# Altium PCB A1_v39_noteardrops.PcbDoc
Units mil, origin at the board's own origin, x right, y up, seen from the top; angles counter-clockwise.
Board outline 3937.01 x 3149.61 mil, 2 copper layers (Top Layer, Bottom Layer); 46 components, 70 nets, 239 pads, 35 vias.
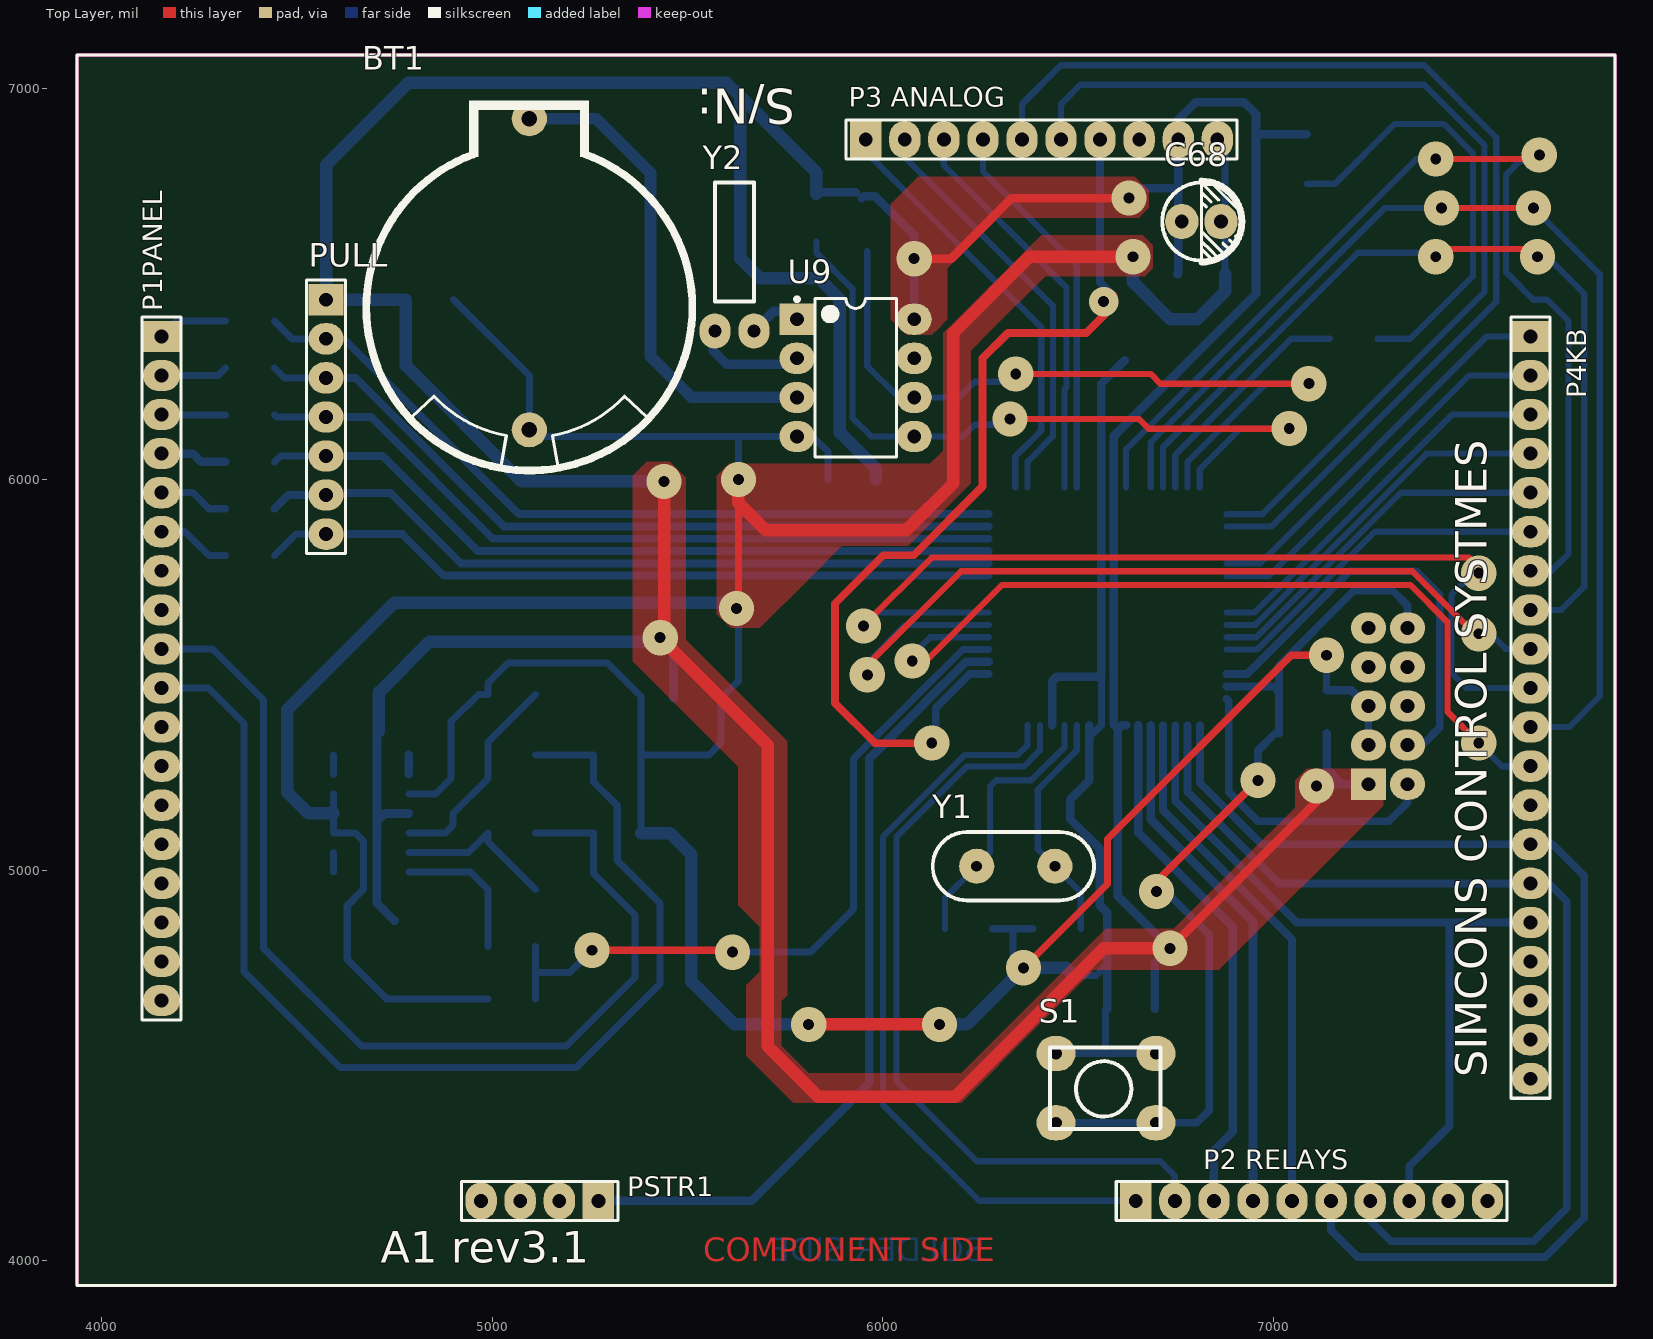
[diagram p0: Top Layer view]
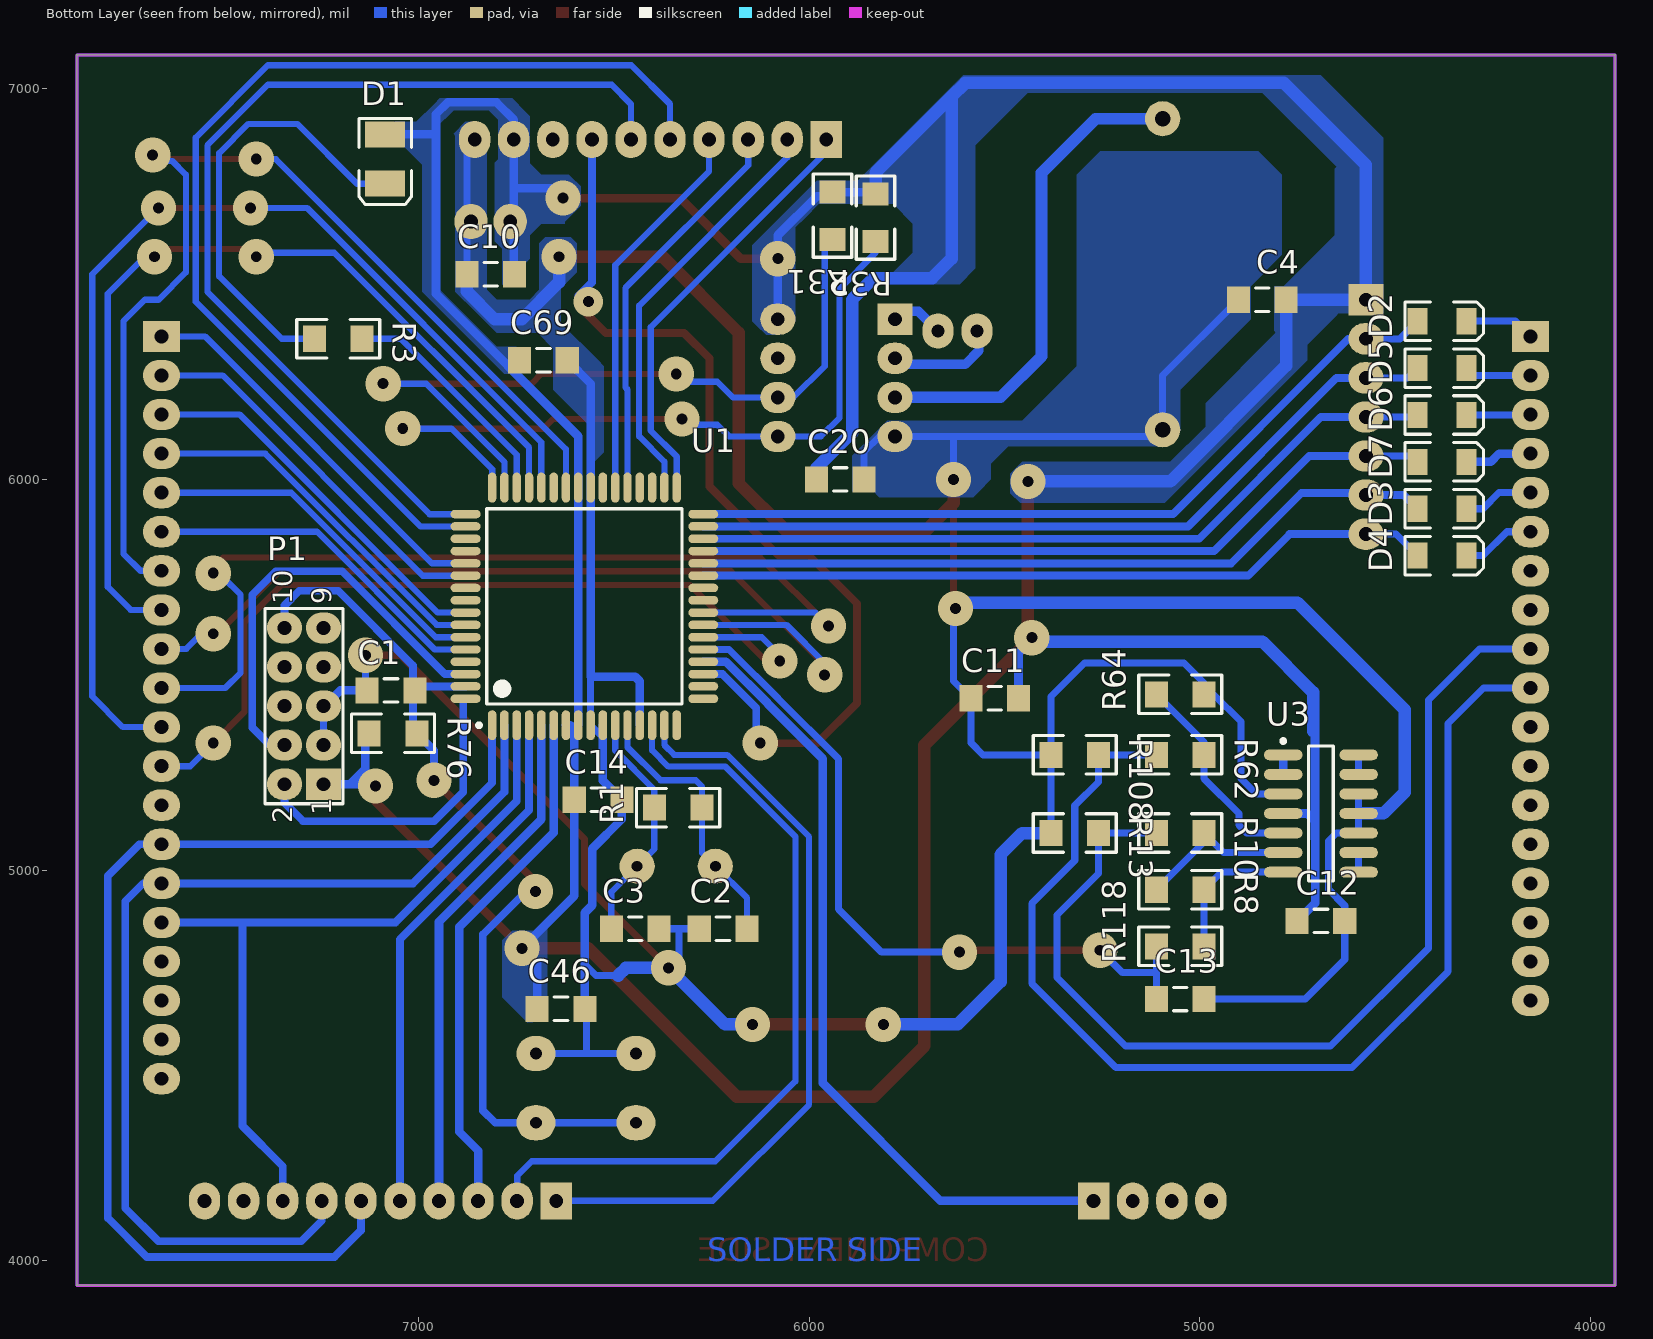
[diagram p1: Bottom Layer view, seen from below]
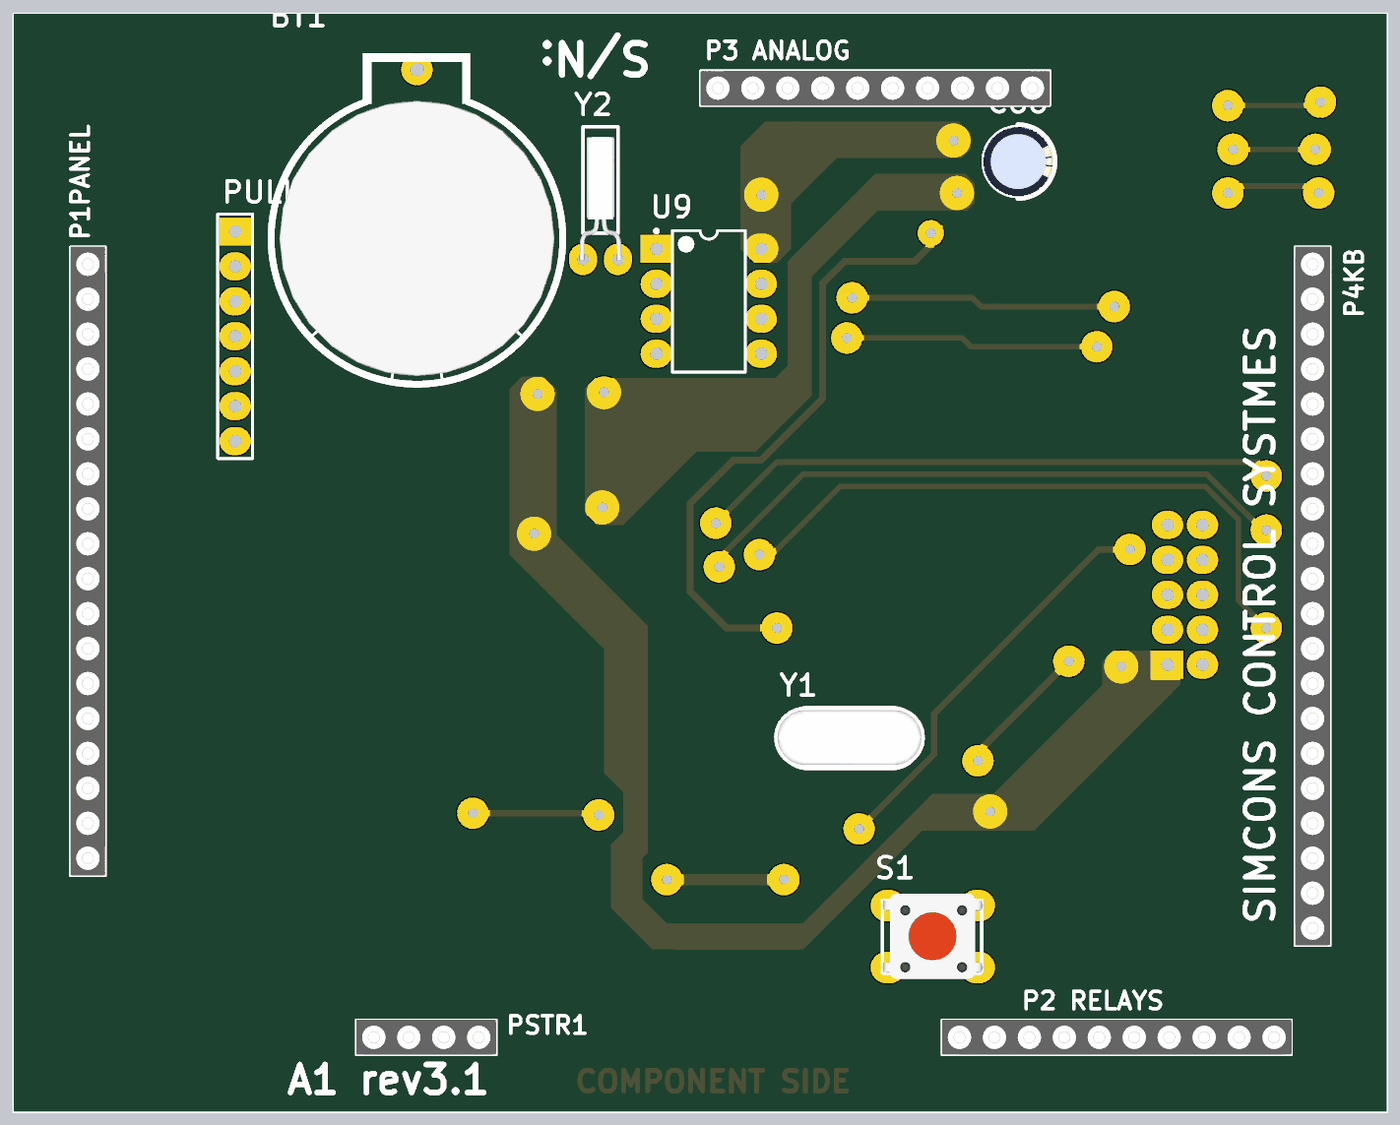
[diagram p2: 3D render of the assembled board from above, using the file's embedded part models]
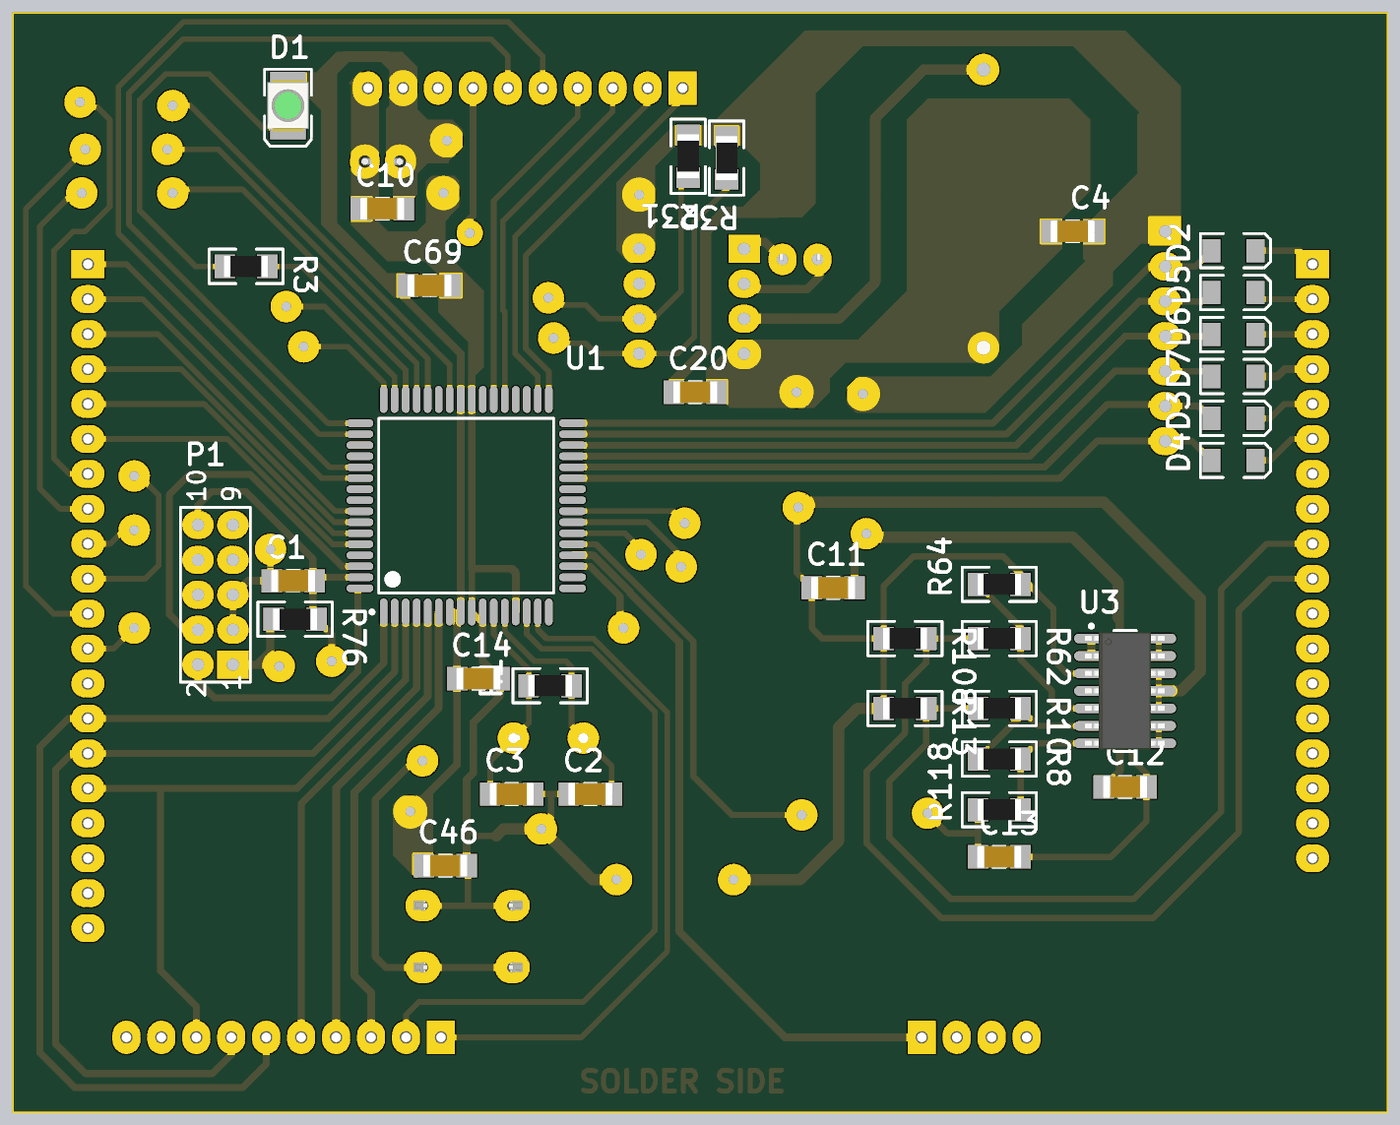
[diagram p3: 3D render of the assembled board from below, using the file's embedded part models]

## Layer stack, top to bottom
Top Solder: solder mask 0.4, Solder Resist, Dk 3.5
Top Layer: signal copper 1.4
Dielectric1: dielectric 12.6, FR-4, Dk 4.8
Bottom Layer: signal copper 1.4
Bottom Solder: solder mask 0.4, Solder Resist, Dk 3.5

## Board outline
3937.01,3937.01 7874.02,3937.01 7874.02,7086.61 3937.01,7086.61

## Design rules (kind name [scope] priority, off if disabled: settings)
Clearance [All] p1: gap=8
Height [All] p1: minheight=0 maxheight=10000 prefheight=500
MinimumSolderMaskSliver [All] p1 off: minsoldermaskwidth=10
PlaneClearance [All] p1: clearance=22
PlaneConnect [All] p1: planeconnectstyle=Direct reliefexpansion=20 reliefentries=4 reliefconductorwidth=10 reliefairgap=10
PolygonConnect [All] p1: connectstyle=Direct reliefconductorwidth=10 reliefentries=4 polygonreliefangle="90 Angle" airgapwidth=10
RoutingVias [All] p1: holewidth=28 width=90 viastyle="Through Hole" minholewidth=28 minwidth=60 maxholewidth=28 maxwidth=100
SilkToSilkClearance [All] p1 off: silktosilkclearance=10
SilkToSolderMaskClearance SilkscreenOverComponentPads [IsPad] p1 off: minsilkscreentomaskgap=10 clearancetoexposedcopper=TRUE
SolderMaskExpansion [All] p1: expansion=4
Width [All] p1: maxlimit=60 minlimit=16 preferedwidth=22
23 further rules are at their usual default settings.

## Components (designator, comment, footprint, x,y, rotation, side; value= is the part's Value field where it differs from the comment)
BT1 "CR2032" CELL_HOLDER 5095,6440 r90 top
C1 ".1uF 1206" C1206_W 7070,5460 r180 bottom
C2 "22pF 1206" C1206_W 6220,4850 r180 bottom
C3 "22pF 1206" C1206_W 6445,4850 r0 bottom
C4 ".1uF 1206" C1206_W 4840,6460 r180 bottom
C10 ".1uF 1206" C1206_W 6815,6525 r180 bottom
C11 "1uF 1206" C1206_W 5525,5440 r180 bottom
C12 ".1uF 1206" C1206_W 4690,4870 r0 bottom
C13 ".1uF 1206" C1206_W 5050,4670 r180 bottom
C14 ".1uF 1206" C1206_W 6540,5180 r0 bottom
C20 ".1uF 1206" C1206_W 5920,6000 r0 bottom
C46 ".1uF 1206" C1206_W 6635,4645 r0 bottom
C68 "100uF/25V" Cap_.1 6815,6660 r90 top
C69 ".1uF 1206" C1206_W 6680,6305 r0 bottom
D1 "LED GREEN SMD" "LED SMD" 7085,6820 r270 bottom
D2 "Diode 1N4001" 4148SMD 4380,6405 r0 bottom
D3 "Diode 1N4001" 4148SMD 4380,5925 r0 bottom
D4 "Diode 1N4001" 4148SMD 4380,5805 r0 bottom
D5 "Diode 1N4001" 4148SMD 4380,6285 r0 bottom
D6 "Diode 1N4001" 4148SMD 4380,6165 r0 bottom
D7 "Diode 1N4001" 4148SMD 4380,6045 r0 bottom
P1 "Header 5X2" HDR2X5 7242.5,5220 r90 bottom
P1PANEL "Header 18" HDR1X18_BURGE_F 4153.54,6366.14 r270 top locked
"P2 RELAYS" "Header 10" HDR1X10_BURGE_F 6647.24,4153.54 r0 top locked
"P3 ANALOG" "Header 10" HDR1X10_BURGE_F 5955.91,6870.08 r0 top locked
P4KB "Header 20" HDR1X20_BURGE_F 7657.48,6366.14 r270 top locked
PSTR1 "Header 4" HDR1X4_BURGE_F 5271.65,4153.54 r180 top locked
PULL "Header 7" HDR1X7 4575,6460 r270 top
R1 "100K 1206" R1206_W 6335,5160 r0 bottom
R3 "1K 1206" R1206_W 7205,6360 r180 bottom
R8 "1M 1206" R1206_W 5050,4950 r180 bottom
R10 "1M 1206" R1206_W 5050,5095 r180 bottom
R13 "47K 1206" R1206_W 5320,5095 r180 bottom
R31 "4.7K 1206" R1206_W 5940,6675 r270 bottom
R32 "4.7K 1206" R1206_W 5830,6670 r270 bottom
R62 "1M 1206" R1206_W 5050,5295 r180 bottom
R64 "1M 1206" R1206_W 5050,5450 r0 bottom
R76 "100K 1206" R1206_W 7065,5350 r180 bottom
R108 "47K 1206" R1206_W 5320,5295 r180 bottom
R118 "100K 1206" R1206_W 5050,4805 r0 bottom
S1 "TACT SWITCH" SWSMALL 6565,4440 r270 top
U1 "MKE02Z Kinetis Cortex M0+ MCU" PLQP0064GA-A_M 6575,5675 r90 bottom
U3 "LM324D" SOIC14_M 4690,5145 r180 bottom
U9 "DS1307" DIP-8 5930,6260 r0 top
Y1 "XTAL 16MHz MINI" XTAL 6340,5010 r180 top
Y2 "XTAL 32.768KHz 6pF" XTALWATCH 5620,6380 r0 top

## Footprints (in the part's own frame and the unit in brackets; to place one, negate y for a bottom-side part, rotate by r counter-clockwise, add the part's x,y. Pads: shape width x height; smd on the part's side, far side on the other; paste and mask are expansions set on the pad)
4148SMD [mm] "Diode 250mA"
  rect 1.3x1.7 smd: 1(1.6,0) 2(-1.6,0)
  silkscreen extent -2.7,-1.25 2.4,1.25, body extent -1.78,-0.76 1.9,0.76, height 1.52
C1206_W [mm] "Chip Capacitor, Body 3.2x1.6mm, IPC High Density"
  rect 1.5x1.7 smd: 1(-1.55,0) 2(1.55,0)
  silkscreen extent -0.44,-0.76 0.44,0.76, body extent -1.6,-0.8 1.6,0.8, height 1
Cap_.1 [mil]
  oval 90x85 hole 35.43: 1(0,50) 2(0,-50)
  silkscreen extent -105,-105 105,100, body extent -100,-100 100,100, height 500
CELL_HOLDER [mil] "Lithium Battery Holder for CR2032 3V Cell"
  round 90 hole 39.37: 1(483.27,0)
  round 90 hole 39.37 mask+0: 2(-312.99,0)
  silkscreen extent -417,-417 530,417, body extent -418,-417 519,418, height 394
DIP-8 [mil] "DIP; 8 Leads; Row Spacing 7.62 mm; Pitch 2.54 mm"
  rect 90x80 hole 35.43: 1(-150,150)
  oval 90x80 hole 35.43: 2(-150,50) 3(-150,-50) 4(-150,-150) 5(150,-150) 6(150,-50) 7(150,50) 8(150,150)
  silkscreen extent -155,-203 104,206, body extent -142,-203 142,203, height 200
HDR1X4_BURGE_F [mil] "Connector; Header; 4 Position"
  rect 80x95 hole 35.43: 1(0,0)
  oval 80x95 hole 35.43: 2(100,0) 3(200,0) 4(300,0)
  silkscreen extent -50,-50 350,50, body extent -50,-50 350,50, height 237
HDR1X7 [mil] "Connector; Header; 7 Position"
  rect 80x90 hole 35.43: 1(0,0)
  oval 80x90 hole 35.43: 2(100,0) 3(200,0) 4(300,0) 5(400,0) 6(500,0) 7(600,0)
  silkscreen extent -50,-50 650,50
HDR1X10_BURGE_F [mil] "Connector; Header; 10 Position"
  rect 80x95 hole 35.43: 1(0,0)
  oval 80x95 hole 35.43: 2(100,0) 3(200,0) 4(300,0) 5(400,0) 6(500,0) 7(600,0) 8(700,0) 9(800,0) 10(900,0)
  silkscreen extent -50,-50 950,50, body extent -50,-50 950,50, height 237
HDR1X18_BURGE_F [mil] "Connector; Header; 18 Position"
  rect 80x95 hole 35.43: 1(0,0)
  oval 80x95 hole 35.43: 2(100,0) 3(200,0) 4(300,0) 5(400,0) 6(500,0) 7(600,0) 8(700,0) 9(800,0) 10(900,0) 11(1000,0) 12(1100,0) 13(1200,0) 14(1300,0) 15(1400,0) 16(1500,0) 17(1600,0) 18(1700,0)
  silkscreen extent -50,-50 1750,50, body extent -50,-50 1750,50, height 237
HDR1X20_BURGE_F [mil] "Connector; Header; 20 Position"
  rect 80x95 hole 35.43: 1(0,0)
  oval 80x95 hole 35.43: 2(100,0) 3(200,0) 4(300,0) 5(400,0) 6(500,0) 7(600,0) 8(700,0) 9(800,0) 10(900,0) 11(1000,0) 12(1100,0) 13(1200,0) 14(1300,0) 15(1400,0) 16(1500,0) 17(1600,0) 18(1700,0) 19(1800,0) 20(1900,0)
  silkscreen extent -50,-50 1950,50, body extent -50,-50 1950,50, height 237
HDR2X5 [mil] "Connector; Header; 5x2 Position"
  rect 80x90 hole 35.43: 1(0,0)
  oval 80x90 hole 35.43: 2(0,100) 3(100,0) 4(100,100) 5(200,0) 6(200,100) 7(300,0) 8(300,100) 9(400,0) 10(400,100)
  silkscreen extent -50,-50 450,150
"LED SMD" [mm] "SM LED; 2 C-Bend Leads; Body 3.5 x 2.8 x 1.9 mm, inc leads (LxWxH typ)"
  rect 1.7x2.6 smd: 1(-1.6,0) 2(1.6,0)
  silkscreen extent -2.65,-1.7 2.95,1.7, body extent -1.85,-1.5 1.85,1.5, height 2.1
PLQP0064GA-A_M [mm] "QFP, 64-Leads, Body 14x14mm, Pitch 0.8mm, IPC Low Density"
  oval 1.95x0.55 smd: 1(-7.725,6) 2(-7.725,5.2) 3(-7.725,4.4) 4(-7.725,3.6) 5(-7.725,2.8) 6(-7.725,2) 7(-7.725,1.2) 8(-7.725,0.4) 9(-7.725,-0.4) 10(-7.725,-1.2) 11(-7.725,-2) 12(-7.725,-2.8) 13(-7.725,-3.6) 14(-7.725,-4.4) 15(-7.725,-5.2) 16(-7.725,-6) 33(7.725,-6) 34(7.725,-5.2) 35(7.725,-4.4) 36(7.725,-3.6) 37(7.725,-2.8) 38(7.725,-2) 39(7.725,-1.2) 40(7.725,-0.4) 41(7.725,0.4) 42(7.725,1.2) 43(7.725,2) 44(7.725,2.8) 45(7.725,3.6) 46(7.725,4.4) 47(7.725,5.2) 48(7.725,6)
  oval 0.55x1.95 smd: 17(-6,-7.725) 18(-5.2,-7.725) 19(-4.4,-7.725) 20(-3.6,-7.725) 21(-2.8,-7.725) 22(-2,-7.725) 23(-1.2,-7.725) 24(-0.4,-7.725) 25(0.4,-7.725) 26(1.2,-7.725) 27(2,-7.725) 28(2.8,-7.725) 29(3.6,-7.725) 30(4.4,-7.725) 31(5.2,-7.725) 32(6,-7.725) 49(6,7.725) 50(5.2,7.725) 51(4.4,7.725) 52(3.6,7.725) 53(2.8,7.725) 54(2,7.725) 55(1.2,7.725) 56(0.4,7.725) 57(-0.4,7.725) 58(-1.2,7.725) 59(-2,7.725) 60(-2.8,7.725) 61(-3.6,7.725) 62(-4.4,7.725) 63(-5.2,7.725) 64(-6,7.725)
  silkscreen extent -7.85,-6.35 6.35,6.98, body extent -7,-7 7,7, height 1.7
R1206_W [mm] "Chip Capacitor, Body 3.2x1.6mm, IPC High Density"
  rect 1.5x1.7 smd: 1(-1.55,0) 2(1.55,0)
  silkscreen extent -2.7,-1.25 2.7,1.25, body extent -1.59,-0.77 1.59,0.77, height 0.63
SOIC14_M [mm] "SOIC, 14-Leads, Body 8.7x3.9mm, Pitch 1.27mm, IPC Low Density"
  oval 2.5x0.7 smd: 1(-2.45,3.81) 2(-2.45,2.54) 3(-2.45,1.27) 4(-2.45,0) 5(-2.45,-1.27) 6(-2.45,-2.54) 7(-2.45,-3.81) 8(2.45,-3.81) 9(2.45,-2.54) 10(2.45,-1.27) 11(2.45,0) 12(2.45,1.27) 13(2.45,2.54) 14(2.45,3.81)
  silkscreen extent -2.58,-4.4 0.8,4.83, body extent -2.92,-4.28 2.88,4.27, height 1.75
SWSMALL [mil]
  oval 90x100 hole 30: 1(86.61,133.86) 1(86.61,-122.05) 2(-90.55,133.86) 2(-90.55,-122.05)
  silkscreen extent -106,-138 102,146, body extent -125,-151 119,161, height 276
XTAL [mil] "Multi Layer Capacitor"
  round 90 hole 28: 1(-100,0) 2(100,0)
  silkscreen extent -200,-88 212,88, body extent -209,-90 224,87, height 142
XTALWATCH [mil]
  oval 80x90 hole 33: 1(50,0) 2(-50,0)
  silkscreen extent -50,75 50,380, body extent -60,-3 60,350, height 79

## Part data
BT1: library part Battery, "Multicell Battery"
C1 C2 C3 C4 C10 C11 C12 C14 C20 C46 C68 C69: library part Cap, "Capacitor"
C13: library part Cap2, "Capacitor"
D1: library part LED1, "Typical RED GaAs LED"
D2 D3 D4 D5 D6 D7: "1 Amp General Purpose Rectifier"
P1: "Header, 5-Pin, Dual row"
P1PANEL: "Header, 18-Pin"
"P2 RELAYS" "P3 ANALOG": "Header, 10-Pin"
P4KB: "Header, 20-Pin"
PSTR1: "Header, 4-Pin"
PULL: "Header, 7-Pin"
R1 R3 R8 R10 R13 R31 R32 R62 R64 R76 R108: library part Res1, "Resistor"
R118: library part "Res Semi", "Semiconductor Resistor"
S1: library part SW-PB, "Switch"
U1: library part MKE02Z64, "32-Bit ARM Cortex M0+ RISC Core, 64KB Program Flash, 256B EEPROM, 4KB RAM, 64-Pin LQFP"
U3: "Quadruple Operational Amplifier"
U9: "64 X 8 Serial Real-Time Clock"
Y1 Y2: library part XTAL, "Crystal Oscillator"

## Via types
v1: diameter 90, hole 28, Top Layer to Bottom Layer, 34 vias
v2: diameter 75, hole 28, Top Layer to Bottom Layer, 1 vias

## Nets (pads, with @x,y where several pads share a name; then routed paths per layer and width w, separated by ;. In a path a pad name is that pad's centre, name@x,y a point inside that pad or via, vN(x,y) a via of type N, cw(c..) or ccw(c..) an arc to the next point about the centre after c; other vN are vias at no path point)
AUTO: P4KB.8 U1.45 | length 2467.9
  Top Layer w16: v1(7415,6570) 7415,6585 7420,6590 7645,6590 v1@7650,6585 ; v1@7655,6580 v1@7650,6585 ; v1(7675,6570) 7650,6595 v1@7650,6585
  Bottom Layer w16: U1.45 6716.73,6081.73 7215,6580 7400,6580 v1@7415,6595 ; P4KB.8 7736.14,5666.14 7795,5725 7795,6475 7690,6580 v1@7665,6580 ; v1(7675,6570) v1@7665,6580 ; v1@7665,6580 7655,6580 7650,6585 7650,6595 v1@7665,6580
BAT: PSTR1.1 U1.20 | length 2057.5
  Bottom Layer w22: PSTR1.1 5663.54,4153.54 5965,4455 5965,5285 6106,5426 6106,5427.01 6209.76,5530.77 6210.37,5530.77 6212.87,5533.27 U1.20
BTS+_R: P1PANEL.10 R62.1 R108.2 | length 2943.5
  Bottom Layer w18: P1PANEL.10 4273.86,5466.14 4365,5375 4365,4740 4610,4495 5215,4495 5430,4710 5430,4915 5320,5025 5320,5165 5258.98,5226.02 R108.2 R62.1
BTS-_R: P1PANEL.9 R10.1 R13.2 | length 2638.7
  Bottom Layer w18: P1PANEL.9 4283.86,5566.14 4415,5435 4415,4800 4665,4550 5190,4550 5365,4725 5365,4885 5258.98,4991.02 R13.2 R10.1
BTSBATT: C13.1 R118.2 U1.21 | length 1872.5
  Top Layer w18: v1(5255,4795) 5615,4795 v1@5620,4800
  Bottom Layer w18: C13.1 5111.02,4737.5 ; R118.2 5111.02,4737.5 ; v1(5255,4795) 5197.5,4737.5 5111.02,4737.5 ; v1(5615,4790) 5815,4790 5925,4900 5925,5285 6078,5438 6078,5438.61 6198.16,5558.77 6198.77,5558.77 6204.76,5564.76 U1.21
BUZZER: "P2 RELAYS.1" U1.15 | length 1952.6
  Bottom Layer w16: U1.15 6370.28,5320.28 6345,5295 6210,5295 6000,5085 6000,4400 6246.46,4153.54 6647.24,4153.54
CONT_S_IN: P1PANEL.8
CRANK: "P2 RELAYS.4" U1.5 | length 1325.8
  Bottom Layer w22: U1.5 6685.24,5129.76 6947.24,4867.76 6947.24,4153.54
DG-B_: "P3 ANALOG.3" U1.37 | length 1023.2
  Bottom Layer w16: 6155.91,6870.08 6155.91,6804.09 6470,6490 6470,6235.47 6464.76,6230.24 U1.37
DG-R_: "P3 ANALOG.1" U1.33 | length 1104.4
  Bottom Layer w16: 5955.91,6870.08 5955.91,6839.09 6405,6390 6405,6125 6338.78,6058.78 U1.33
DG-Y_: "P3 ANALOG.2" U1.34 | length 1074.8
  Bottom Layer w16: 6055.91,6870.08 6055.91,6824.09 6435,6445 6435,6110 6370.28,6045.28 U1.34
DGSTOP: "P2 RELAYS.5" U1.4 | length 1354.2
  Bottom Layer w20: U1.4 6716.73,5153.27 7047.24,4822.76 7047.24,4153.54
DOWN: P4KB.10 U1.24 | length 2511.3
  Top Layer w16: v1(5950,5625) 6125,5800 7500,5800 7540,5760 v1(7525,5760)
  Bottom Layer w16: v1(5950,5625) 5984.25,5659.25 U1.24 ; v1@7500,5750 7455,5705 7455,5505 7493.86,5466.14 P4KB.10
EB-B_: "P3 ANALOG.6" U1.49 | length 2530.9
  Bottom Layer w16: 6455.91,6870.08 6455.91,6960.91 6505,7010 7385,7010 7540,6855 7540,6480 6971.22,5911.22 U1.49
EB-R_: "P3 ANALOG.4" U1.38 | length 990.5
  Bottom Layer w16: 6255.91,6870.08 6255.91,6789.09 6496.26,6548.74 U1.38
EB-Y_: "P3 ANALOG.5" U1.50 | length 2771.8
  Bottom Layer w16: 6355.91,6870.08 6355.91,6960.91 6455,7060 7385,7060 7570,6875 7570,6455 6994.72,5879.72 U1.50
EMSTP: D7.1 PULL.5 U1.29 | length 1934.9
  Bottom Layer w18: D7.1 4457.99,6060 PULL.5
  Bottom Layer w20: PULL.5 4720,6060 4963.27,5816.73 U1.29
EMSTPIN: D7.2 P1PANEL.4 | length 172.2
  Bottom Layer w22: P1PANEL.4 4233.86,6066.14 4255,6045 D7.2
FAULTIND: P4KB.7 U1.42 | length 2749.6
  Top Layer w16: v1(7415,6820) 7415,6815 7420,6810 7420,6820 v1@7665,6820
  Bottom Layer w16: U1.42 6622.24,6077.24 7365,6820 v1(7415,6820) ; P4KB.7 7711.14,5766.14 7755,5810 7755,6405 7700,6460 7665,6460 7595,6530 7595,6780 7630,6815 7675,6815 7680,6820 v1(7680,6830)
FLDIR: D3.1 PULL.6 U1.28 | length 1918.9
  Bottom Layer w20: D3.1 4477.99,5960 PULL.6 4580,5965 4740,5965 4919.76,5785.24 U1.28
FLDIRIN: D3.2 P1PANEL.5 | length 180.5
  Bottom Layer w18: P1PANEL.5 4233.86,5966.14 4275,5925 D3.2
FLGIN: P1PANEL.11
FLSTART: "P2 RELAYS.3" U1.6 | length 1337
  Bottom Layer w22: U1.6 6653.74,5096.26 6895,4855 6895,4330 6847.24,4282.24 6847.24,4153.54
FLT1: D2.1 PULL.2 U1.32 | length 2032.4
  Bottom Layer w18: D2.1 4487.99,6360 PULL.2
  Bottom Layer w20: PULL.2 4620,6360 5068.78,5911.22 U1.32
FLT1IN: D2.2 P1PANEL.1 | length 179.6
  Bottom Layer w18: P1PANEL.1 4192.4,6405 D2.2
FREQ: "P3 ANALOG.7" U1.19 | length 2618.8
  Top Layer w20: v2(6565,6455) 6575,6455 6590,6470 6590,6445 6520,6375 6320,6375 6255,6310 6255,5981.92 6079.08,5806 6001,5806 5877,5682 5877,5428 5980,5325 v1(6125,5325) ; v1(6125,5325) 6150,5325 6125,5350 v1(6125,5325)
  Bottom Layer w20: v1(6125,5325) 6125,5350 6135,5360 6135,5415 6221.77,5501.77 U1.19 ; 6555.91,6870.08 6555.91,6504.09 6590,6470 6575,6455 v2(6565,6455)
GCONTACT: "P2 RELAYS.8" P4KB.16 U1.3 | length 1987.6
  Bottom Layer w20: U1.3 6748.23,5176.77 7058.86,4866.14 7448.86,4866.14 ; 7347.24,4153.54 7347.24,4242.24 7450,4345 7450,4865 7448.86,4866.14 ; P4KB.16 7448.86,4866.14
GND: "P3 ANALOG.10" BT1.2 C1.1 C2.1 C3.1 C4.1 C10.1 C11.1 C12.1 C13.2 C14.1 C20.1 C46.1 C68.2 C69.1 P1.3 P1.5 R13.1 R64.1 R108.1 S1.2 U1.9 U1.10 U1.13 U1.40 U3.3 U3.10 U3.11 U3.12 U9.4 | length 14085.6
  Top Layer w18: v1@5630,5670 5630,5940 ; v1(6360,4750) 6575,4965 6575,5080 7045,5550 v1(7135,5550)
  Top Layer w32: v1(5630,6000) 5630,5940 5700,5870 6060,5870 6180,5990 6180,6375 6375,6570 v1(6640,6570) ; v1(5810,4605) v1(6145,4605)
  Bottom Layer w18: U3.12 U3.11 U3.10 4650,5095 4670,5075 4670,4950 4628.98,4908.98 C12.1 4628.98,4771.02 4730,4670 C13.2 ; U3.3 4855,5195 4895,5235 4895,5380 4965,5450 R64.1 4988.98,5478.98 5040,5530 5295,5530 5381.02,5443.98 R108.1 ; C4.1 5095,6266.02 BT1.2 5112.01,6110 5630,6110 ; R13.1 R108.1 ; v1@5630,5655 5630,5483.98 C11.1 5586.02,5326.02 5555,5295 R108.1 ; v1(5630,6000) 5630,6110 ; C20.1 5858.98,6071.02 5820,6110 U9.4 5630,6110 ; C2.1 C3.1 ; 6332.5,4847.5 6332.5,4777.5 v1(6360,4750) ; S1.2@6442.95,4530.55 6570,4530.55 ; 6488.98,4730 6545,4730 6573.98,4758.98 ; U1.10@6527.76,5339.37 U1.9 6559.25,5495 ; C46.1@6570,4641.02 6570,4530.55 ; S1.2@6698.86,4530.55 6570,4530.55 ; 6855.91,6870.08 6876.02,6849.96 C10.1 ; v1(7135,5550) 7135,5461.02 C1.1@7136.02,5460 ; P1.3 P1.5
  Bottom Layer w22: U1.13 6433.27,5483.27 6445,5495 6559.25,5495 U1.40 6559.25,6245.28 C69.1 ; U1.10 6527.76,5339.37 6527.76,5228.78 C14.1 6478.98,5131.02 6555,5055 6555,4910 6573.98,4891.02 6573.98,4758.98 C46.1 C46.1@6570,4641.02 ; C1.1@7136.02,5460 7200,5460 7240,5420 P1.5
  Bottom Layer w32: U3.11 4530,5145 4475,5200 4475,5410 4750,5685 v1@5600,5685 ; R13.1 5455,5095 5510,5040 5510,4715 5620,4605 v1(5810,4605) ; v1(6145,4605) 6215,4605 v1(6360,4750) 6468.98,4750 6488.98,4730 ; v1(6640,6570) 6640,6505 6735,6410 6805,6410 6876.02,6481.02 C10.1
  other v1: 5625,5670
HT: D5.1 PULL.3 U1.31 | length 1995.7
  Bottom Layer w18: D5.1 4467.99,6260 PULL.3
  Bottom Layer w20: PULL.3 4650,6260 5030.28,5879.72 U1.31
HTIN: D5.2 P1PANEL.2 | length 171.3
  Bottom Layer w18: P1PANEL.2 4298.15,6266.14 D5.2
LCD_DB#4: P4KB.3 U1.57 | length 988.3
  Bottom Layer w16: U1.57 6950.66,5659.25 7457.55,6166.14 P4KB.3
LCD_DB#5: P4KB.4 U1.58 | length 959.9
  Bottom Layer w16: U1.58 6953.1,5627.76 7391.49,6066.14 P4KB.4
LCD_DB#6: P4KB.5 U1.59 | length 931.6
  Bottom Layer w16: U1.59 6955.55,5596.26 7325.43,5966.14 P4KB.5
LCD_DB#7: P4KB.6 U1.60 | length 903.2
  Bottom Layer w16: U1.60 6957.99,5564.76 7259.37,5866.14 P4KB.6
LCD_E#: P4KB.2 U1.54 | length 990.6
  Bottom Layer w16: U1.54 6988.74,5753.74 7501.14,6266.14 P4KB.2
LCD_RS#: P4KB.1 U1.53 | length 1019
  Bottom Layer w16: U1.53 6965.24,5785.24 7546.14,6366.14 P4KB.1
LED: R3.2 U1.46 | length 602.8
  Bottom Layer w16: U1.46 6748.23,6063.23 7045,6360 R3.2
LLOP: D6.1 PULL.4 U1.30 | length 1959.1
  Bottom Layer w18: D6.1 4447.99,6160 PULL.4
  Bottom Layer w20: PULL.4 4690,6160 5001.77,5848.23 U1.30
LLOPIN: D6.2 P1PANEL.3 | length 163.9
  Bottom Layer w18: P1PANEL.3 4154.69,6165 D6.2
MANUAL_R: "P2 RELAYS.6" P4KB.14 U1.1 | length 2897.8
  Bottom Layer w20: U1.1 6811.22,5223.78 6968.86,5066.14 P4KB.14 7713.86,5066.14 7795,4985 7795,4110 7695,4010 7215,4010 7147.24,4077.76 7147.24,4153.54
MCONTACT: "P2 RELAYS.7" P4KB.15 U1.2 | length 2652.6
  Bottom Layer w20: U1.2 6779.72,5200.28 7013.86,4966.14 P4KB.15 7703.86,4966.14 7750,4920 7750,4135 7665,4050 7300,4050 7247.24,4102.76 7247.24,4153.54
MENU: P4KB.11 U1.44 | length 2909.4
  Top Layer w16: v1(7665,6695) v1(7430,6695) ; v1(7430,6695) 7420,6695 7430,6685 v1(7430,6695)
  Bottom Layer w16: 6685,6032.68 6685.24,6032.45 ; U1.44 6685.24,6032.45 ; v1(7430,6695) 7285,6695 6685.24,6095.24 6685.24,6032.45 ; P4KB.11 7756.14,5366.14 7835,5445 7835,6525 v1(7665,6695)
NetBT1_1: BT1.1 U9.3 | length 1255.8
  Bottom Layer w30: BT1.1 5266.73,6923.27 5405,6785 5405,6315 5510,6210 U9.3
NetC2_2: C2.2 R1.1 U1.12 Y1.2 | length 700.2
  Bottom Layer w16: C2.2 6158.98,4928.98 Y1.2 6273.98,5043.98 R1.1 6273.98,5213.98 6290,5230 6380,5230 6464.76,5314.76 U1.12
NetC3_2: C3.2 R1.2 U1.11 Y1.1 | length 607.9
  Bottom Layer w16: U1.11 6496.26,5306.26 6396.02,5206.02 R1.2 6396.02,5053.98 Y1.1 6506.02,4943.98 C3.2
NetD1_2: D1.2 R3.1 | length 1144.7
  Bottom Layer w16: D1.2 7157.01,6757.01 7310,6910 7435,6910 7510,6835 7510,6520 7350,6360 R3.1
NetR8_1: R8.1 R10.2 U3.6 | length 418.8
  Bottom Layer w18: U3.6 4938.98,5045 R10.2 4988.98,5072.05 R8.1
NetR8_2: R8.2 R118.1 U3.7 | length 366.2
  Bottom Layer w18: U3.7 4943.98,4995 R8.2 R118.1
NetR62_2: R62.2 R64.2 U3.5 | length 544.2
  Bottom Layer w18: U3.5 4880,5095 4900,5115 4900,5145 4988.98,5233.98 R62.2 4988.98,5327.95 R64.2
NetU3_1: U3.1 U3.2 | length 50
  Bottom Layer w22: U3.2 U3.1
NetU3_8: U3.8 U3.9 | length 50
  Bottom Layer w18: U3.8 U3.9
NetU3_13: U3.13 U3.14 | length 50
  Bottom Layer w18: U3.13 U3.14
NetU9_1: U9.1 Y2.1 | length 146.1
  Bottom Layer w24: Y2.1@5665,6375 Y2.1 5720,6430 5760,6430 U9.1
NetU9_2: U9.2 Y2.2 | length 280.7
  Bottom Layer w24: Y2.2@5565,6375 5565,6330 5600,6295 5765,6295 U9.2
PREHEATER: "P2 RELAYS.2" U1.14 | length 2025.1
  Bottom Layer w16: U1.14 6401.77,5306.77 6360,5265 6213.94,5265 6035,5086.06 6035,4460 6240,4255 6710,4255 6747.24,4217.76 6747.24,4153.54
R1IN: P1PANEL.12
REMOT: D4.1 PULL.7 U1.27 | length 1894.7
  Bottom Layer w18: D4.1 4497.99,5860 PULL.7
  Bottom Layer w20: PULL.7 4770,5860 4876.26,5753.74 U1.27
REMOTIN: D4.2 P1PANEL.6 | length 188.8
  Bottom Layer w18: P1PANEL.6 4213.86,5866.14 4275,5805 D4.2
RESET: C1.2 P1.10 R76.2 S1.1 U1.63 | length 2352.9
  Top Layer w20: v1(6700,4945) 6700,4970 v1(6960,5230)
  Bottom Layer w20: S1.1@6442.95,4353.39 6698.86,4353.39 6803.39,4353.39 6835,4385 6835,4835 6725,4945 v1(6700,4945) ; U1.63 C1.2@7003.7,5470.28 ; v1(6960,5230) 6960,5306.02 R76.2 ; C1.2 C1.2@7013.98,5465 ; R76.2@7013.98,5350 C1.2@7013.98,5465 ; P1.10 7342.5,5677.5 7305,5715 7205,5715 7013.98,5523.98 C1.2@7013.98,5465
RESET_KEY: P4KB.12 U1.22 | length 2351.2
  Top Layer w16: v1(7525,5325) 7445,5405 7445,5635 7350,5730 6305,5730 6110,5535 v1(6075,5535) v1@6070,5535 ; v1@6070,5535 6050,5515 6050,5525 6060,5535 v1@6070,5535
  Bottom Layer w16: v1(6075,5535) 6070,5535 6050,5515 6050,5525 6121.26,5596.26 U1.22 ; v1(7525,5325) 7583.86,5266.14 P4KB.12
RSTARTIN: P1PANEL.7
RX: U1.52
SCL: R31.2 U1.47 U9.6 | length 1877.9
  Top Layer w16: v1(6340,6270) 6685,6270 6710,6245 v1(7090,6245)
  Bottom Layer w16: 5960,6583.98 5960,6290 U9.6@6040,6210 ; U9.6 6195,6210 6235,6250 v1@6315,6250 ; U1.47 6779.72,6044.72 6980,6245 v1(7090,6245)
SDA: R32.2 U1.48 U9.5 | length 1943.6
  Top Layer w16: v1(6325,6155) 6655,6155 6680,6130 v1(7040,6130)
  Bottom Layer w16: R32.2 5830,6580 5922,6488 5922,6158 5970,6110 U9.5 6205,6110 6235,6140 v1@6300,6140 ; U1.48 6811.22,6026.22 6915,6130 v1(7040,6130)
SWD_CLK: P1.4 U1.62 | length 1120.9
  Bottom Layer w20: U1.62 6931.77,5501.77 7195,5765 7365,5765 7425,5705 7425,5365 7380,5320 P1.4
SWD_DIO: P1.2 U1.64 | length 797
  Bottom Layer w20: U1.64 6885,5432.91 6885,5200 6960,5125 7295,5125 7342.5,5172.5 P1.2
TIOUT: P1PANEL.13
TX: U1.51
UP: P4KB.9 U1.23 | length 2319.8
  Top Layer w16: v1(5960,5500) 5960,5525 6200,5765 7355,5765 7515,5605 v1(7525,5605)
  Bottom Layer w16: v1(5960,5500) 5960,5530 6057.76,5627.76 U1.23 ; v1(7525,5605) 7515,5605 7510,5610 7550,5610 7593.86,5566.14 P4KB.9
VCC: "P3 ANALOG.9" C4.2 C10.2 C11.2 C12.2 C14.2 C20.2 C46.2 C68.1 C69.2 D1.1 P1.1 PULL.1 R31.1 R32.1 R76.1 U1.7 U1.8 U1.41 U3.4 U9.8 | length 14010.5
  Top Layer w22: v1(6080,6565) 6175,6565 6330,6720 v1(6630,6720) ; v1(6735,4800) 7110,5175 v1(7110,5215)
  Top Layer w32: v1(5440,5995) 5440,5605 v1(5430,5595) 5705,5320 5705,4550 5835,4420 6185,4420 6565,4800 v1(6735,4800)
  Bottom Layer w22: 4705,5080 4705,4915 4750,4870 C12.2 ; 4710,5130 4725,5145 U3.4 ; v1@5435,5585 5463.98,5556.02 C11.2 ; R32.1@5830,6735 R31.1@5930,6735 ; R31.1@5946.02,6720 5951.02,6725 5980,6725 6080,6625 v1(6080,6565) U9.8 ; U1.8 U1.41 6590.75,6110.75 6955,6475 6955,6885 ; U1.7 6611.3,5370.87 6601.02,5360.59 C14.2 6601.02,4933.98 v1(6735,4800) 6696.02,4761.02 C46.2 ; v1(6630,6720) 6655,6745 6755.91,6745 ; C10.2 6755.91,6526.93 6755.91,6745 ; D1.1 6957.01,6882.99 6955,6885 ; v1@7110,5220 7175,5220 ; R76.1@7136.02,5350 7136.02,5258.98 7175,5220 ; P1.1 7175,5220 ; 6755.91,6745 6755.91,6870.08 6755.91,6920.91 6800,6965 6925,6965 6955,6935 6955,6885
  Bottom Layer w24: 4705,5080 4705,5350 4710,5355
  Bottom Layer w32: 4710,5355 4710,5455 4840,5585 v1@5435,5585 ; v1(5440,5995) 5075,5995 4778.98,6291.02 C4.2 PULL.1 4575,6805 4785,7015 5600,7015 5635,6980 ; R32.1 5830,6735 5830,6785 5635,6980 ; C20.2 5981.02,6028.98 5890,6120 5890,6460 5835,6515 5685,6515 5635,6565 5635,6980
pads on no net: "P2 RELAYS.9" "P2 RELAYS.10" "P3 ANALOG.8" P1.6 P1.7 P1.8 P1.9 P1PANEL.14 P1PANEL.15 P1PANEL.16 P1PANEL.17 P1PANEL.18 P4KB.13 P4KB.17 P4KB.18 P4KB.19 P4KB.20 PSTR1.2 PSTR1.3 PSTR1.4 U1.16 U1.17 U1.18 U1.25 U1.26 U1.35 U1.36 U1.39 U1.43 U1.55 U1.56 U1.61 U9.7
copper on no net: | length 28346.5
  Top Layer w8: 3937.01,3937.01 3937.01,7086.61 7874.02,7086.61 7874.02,3937.01 3937.01,3937.01
  Bottom Layer w8: 3937.01,3937.01 3937.01,7086.61 7874.02,7086.61 7874.02,3937.01 3937.01,3937.01

## Polygon pours and split planes (outlines as drawn)
GND on Bottom Layer "Top Layer-No Net 1" (solid, remove dead copper, pour order 22): 5890,5970 5890,6060 5820,6130 5800,6150 5750,6150 5455,6150 5315,6290 5315,6780 5260,6835 5255,6840 5095,6840 4850,6840 4790,6780 4790,6575 4870,6495 4870,6410 4895,6385 5050,6230 5050,6130 5050,6125 5090,6085 5315,6085 5490,6085 5535,6040 5535,6000 5565,5970 5580,5955 5680,5955 5820,5955 5840,5975 5845,5970 5870,5970
GND on Bottom Layer "Top Layer-No Net 1" (solid, remove dead copper, pour order 20): 6855,6915 6880,6915 6910,6885 6905,6880 6905,6665 6905,6480 6855,6430 6800,6375 6710,6375 6695,6375 6655,6335 6655,6270 6655,6230 6615,6190 6565,6140 6565,6030 6525,6070 6525,6135 6525,6290 6540,6305 6635,6400 6635,6475 6635,6490 6620,6505 6595,6530 6595,6575 6595,6605 6610,6620 6660,6620 6675,6620 6690,6605 6690,6485 6715,6460 6800,6460 6825,6485 6825,6655 6825,6860 6820,6865
VCC on Bottom Layer "Top Layer-No Net 1" (solid, remove dead copper, pour order 18): 6795,6865 6795,6920 6820,6945 6910,6945 6920,6935 6945,6910 6945,6805 6945,6485 6840,6380 6800,6340 6750,6340 6750,6285 6765,6270 6780,6270 6865,6355 6990,6480 6990,6775 6990,6805 7040,6855 7060,6875 7060,6915 7005,6915 6960,6960 6945,6975 6890,6975 6760,6975 6725,6940 6715,6930 6715,6865
VCC on Bottom Layer "Top Layer-No Net 1" (solid, remove dead copper, pour order 16): 6720,4610 6785,4675 6785,4800 6785,4820 6760,4845 6715,4845 6705,4845 6660,4890 6650,4880 6650,4875 6670,4855 6670,4615
VCC on Bottom Layer "Top Layer-No Net 1" (solid, remove dead copper, pour order 12): 5115,6990 4840,6990 4650,6800 4655,6795 4655,6625 4785,6495 4810,6495 4810,6380 4805,6375 4985,6195 4985,6135 5075,6045 5415,6045 5455,6045 5485,6015 5485,5965 5460,5940 5090,5940 5020,6010 4725,6305 4725,6345 4650,6420 4645,6425 4530,6425 4530,6875 4580,6925 4690,7035 5115,7035
VCC on Bottom Layer "Top Layer-No Net 1" (solid, remove dead copper, pour order 10): 5805,6530 5785,6530 5725,6590 5720,6585 5635,6585 5635,6505 5640,6500 5805,6500
VCC on Bottom Layer "Top Layer-No Net 1" (solid, remove dead copper, pour order 8): 6075,6370 6110,6370 6135,6395 6145,6405 6145,6575 6145,6600 6075,6670 5980,6765 5915,6765 5875,6765 5810,6830 5605,7035 5530,7035 5060,7035 5055,7030 5055,7005 5065,6995 5070,6990 5305,6990 5440,6990 5550,6880 5575,6855 5575,6540 5615,6500 5735,6500 5735,6655 5785,6705 5815,6705 5975,6705 6010,6670 6035,6645 6035,6560 6035,6405 6045,6395
VCC on Bottom Layer "Top Layer-No Net 1" (solid, remove dead copper, pour order 4): 6715,6625 6685,6655 6625,6655 6625,6660 6590,6695 6585,6700 6585,6735 6585,6750 6610,6775 6615,6780 6675,6780 6685,6780 6730,6825 6770,6785 6770,6755 6770,6625
VCC on Bottom Layer "Top Layer-No Net 1" (solid, remove dead copper, pour order 2): 6745,6495 6780,6495 6785,6500 6785,6590 6805,6610 6805,6680 6805,6810 6795,6820 6795,6865 6715,6865 6715,6565 6730,6550
GND on Top Layer "Top Layer-No Net 1" (solid, remove dead copper, pour order 26): 5805,6040 5605,6040 5580,6015 5575,6010 5575,5665 5575,5655 5600,5630 5610,5620 5665,5620 5685,5620 5810,5745 5900,5835 5960,5835
GND on Top Layer "Top Layer-No Net 1" (solid, remove dead copper, pour order 24): 6690,6575 6690,6540 6670,6520 6570,6520 6415,6520 6275,6380 6225,6330 6225,6225 6225,5990 6210,5975 6065,5830 5985,5830 5775,5830 5735,5870 5735,5970 5780,6015 5805,6040 6100,6040 6120,6040 6145,6065 6150,6070 6155,6075 6155,6235 6155,6375 6175,6395 6405,6625 6665,6625 6690,6600
VCC on Top Layer "Top Layer-No Net 1" (solid, remove dead copper, pour order 14): 5440,6045 5455,6045 5490,6010 5495,6005 5495,5850 5495,5590 5710,5375 5755,5330 5755,4935 5755,4680 5740,4665 5740,4605 5740,4550 5770,4520 5810,4480 6165,4480 6200,4480 6460,4740 6570,4850 6745,4850 6920,5025 7055,5160 7055,5230 7085,5260 7280,5260 7280,5165 6860,4745 6680,4745 6540,4745 6395,4600 6200,4405 5840,4405 5770,4405 5720,4455 5650,4525 5650,4655 5650,4705 5685,4740 5685,4840 5685,4855 5660,4880 5630,4910 5630,5265 5470,5425 5360,5535 5360,5955 5360,6010 5395,6045
VCC on Top Layer "Top Layer-No Net 1" (solid, remove dead copper, pour order 6): 6635,6670 6655,6670 6675,6690 6680,6695 6680,6735 6680,6740 6655,6765 6645,6775 6570,6775 6090,6775 6030,6715 6020,6705 6020,6565 6020,6410 6045,6385 6060,6370 6090,6370 6125,6370 6140,6385 6165,6410 6165,6540 6295,6670 6630,6670

## Keep-outs
Keep-Out Layer:
  the board outline again, w8

## Other copper
Top Layer:
  text "COMPONENT SIDE" at 5540.23,3999 h60
Bottom Layer:
  text "SIMCONS   A1 rev3.1" at 8190,6030 h60 r90
  text "SOLDER SIDE" at 6260,3999 h60

## Silkscreen, mask and mechanical layers (free items; w line width, h text height)
Top Overlay:
  the board outline again, w8
  text "S/N:" at 5775,7000 h90 r180
  text "SIMCONS CONTROL SYSTMES" at 7545,4470 h80 r90
  text "A1 rev3.1" at 4715,3995 h80
Top Solder:
  the board outline again, w8
Bottom Solder:
  the board outline again, w8

## Text inside footprints (layer, text, board x,y; h text height)
P1: Bottom Overlay "2" at 7322.5,5120 h50 r270; Bottom Overlay "1" at 7222.5,5140 h50 r270; Bottom Overlay "9" at 7222.5,5680 h50 r270; Bottom Overlay "10" at 7322.5,5680 h50 r270